# EAGLE board ESP_CAM_VVN_v2 (EAGLE 9.6.2)
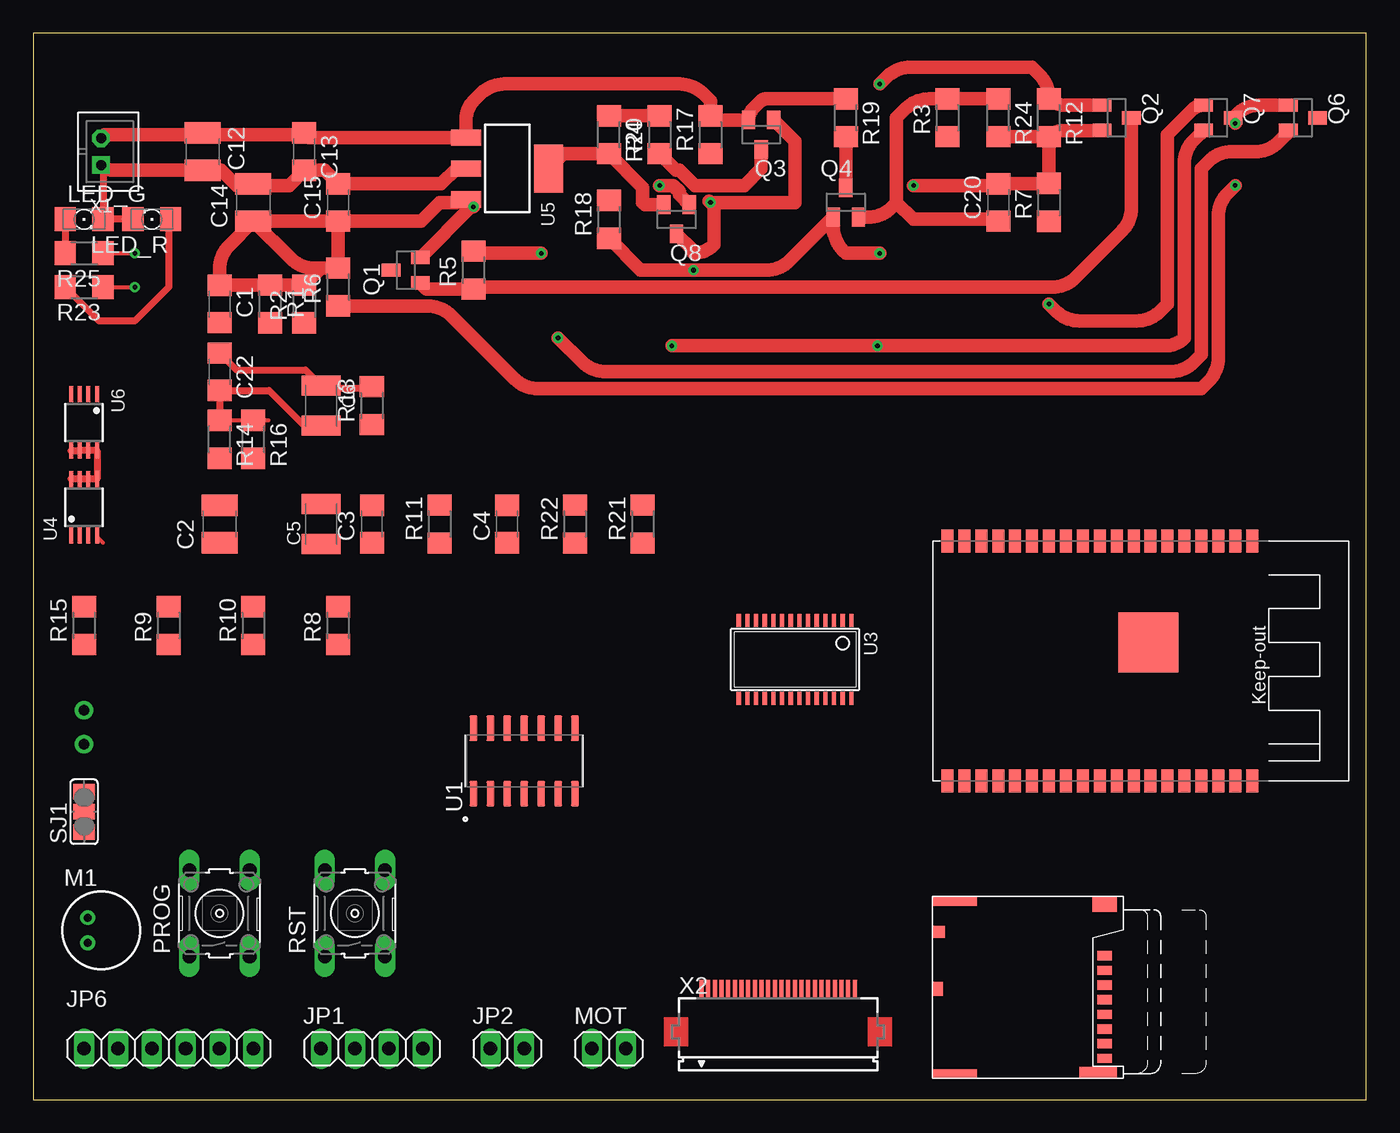
[diagram p0: board, top side]
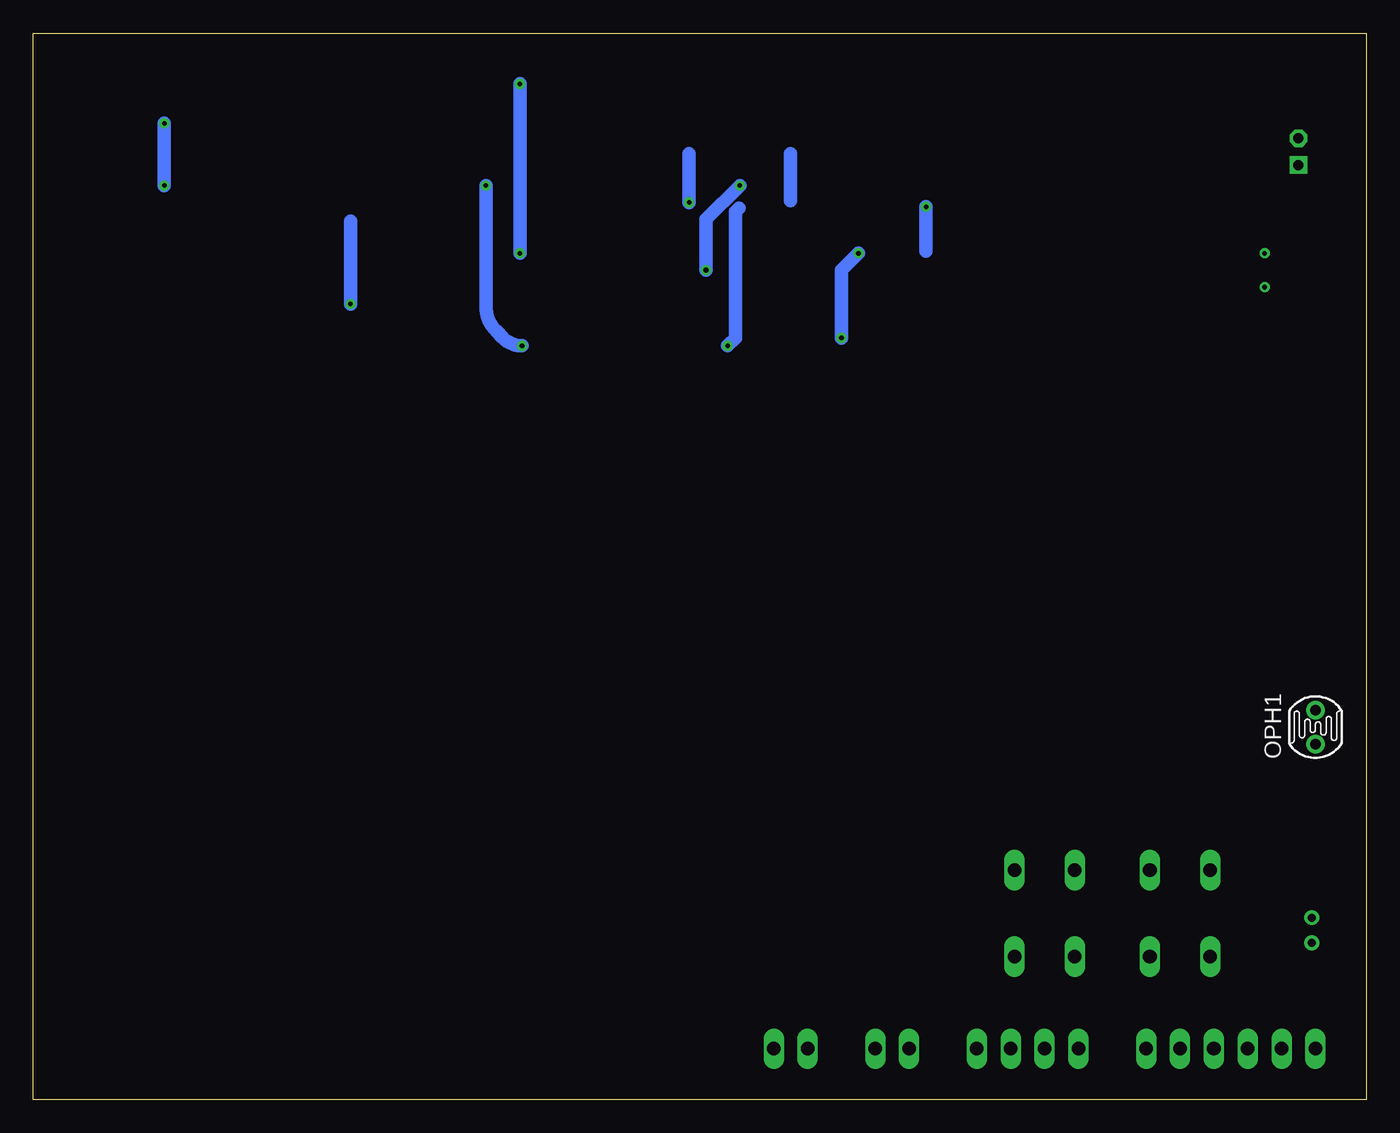
[diagram p1: board, bottom side, seen from below]

Size 100 x 80 mm. Coordinates in mm from the lower left corner, seen from the top.
Outline: 0,0 100,0 100,80 0,80 0,0
Copper layers (1*16): Top 0.035mm / dielectric 1.5mm / Bottom 0.035mm
Design rules "default": minimum track width 6mil, minimum drill 0.35mm, track to track 6mil, track to pad 6mil, pad to pad 6mil, via to via 6mil, smd to smd 6mil, copper to edge 40mil, drill to drill 6mil, minimum pad ring 10mil, minimum via ring 8mil, stop-mask expansion 4mil, vias tented up to drill 0mil, thermal gap 10mil

## Footprints (pad centres in the part's own frame; a part is rotated, then mirrored left to right if it is on the bottom)
C1206 = smd 1.6 x 1.8: 1 -1.4,0; 2 1.4,0
C1210 = smd 1.6 x 2.7: 1 -1.4,0; 2 1.4,0
C1210K = smd 1.5 x 2.9: 1 -1.5,0; 2 1.5,0
1X04 = drill 1.016 long: 1 -3.81,0; 2 -1.27,0; 3 1.27,0; 4 3.81,0
1X02 = drill 1.016 long: 1 -1.27,0; 2 1.27,0
1X06 = drill 1.016 long: 1 -6.35,0; 2 -3.81,0; 3 -1.27,0; 4 1.27,0; 5 3.81,0; 6 6.35,0
1206 = smd 1.6 x 1.803: A -1.422,0; C 1.422,0
WM-62PC/62PK = drill 0.6 pad 1: 1 -1,0.95; 2 -1,-0.95
VT900 = drill 0.8 pad 1.4: 1 -1.27,0; 2 1.27,0
B3F-10XX = drill 1.016 long: 1 -3.251,2.261; 2 3.251,2.261; 3 -3.251,-2.261; 4 3.251,-2.261
SOT23 = smd 1 x 1.4: 1 -0.95,-1.1; 2 0.95,-1.1; 3 0,1.1
R1206 = smd 1.6 x 1.803: 1 -1.422,0; 2 1.422,0
MICROSDMOLEX = smd 0.7 x 1.1: P$1 12.15,-0.9; P$2 11.05,-0.9; P$3 9.95,-0.9; P$4 8.85,-0.9; P$5 7.75,-0.9; P$6 6.65,-0.9; P$7 5.55,-0.9; P$8 4.45,-0.9 | smd 1.14 x 1.83: P$9 0.57,-0.915 | smd 0.7 x 3.33: P$10 0.35,-12.165; P$11 13.31,-12.165 | smd 0.86 x 2.8: P$12 13.23,-1.4 | smd 0.9 x 0.93: P$13 2.66,-13.365 | smd 1.05 x 0.78: P$14 6.925,-13.44
SJ_2 = smd 1.168 x 1.6: 1 -1.524,0; 2 0,0; 3 1.524,0
SOIC127P600X175-14N = smd 1.9 x 0.6: 1 -2.455,3.81; 2 -2.455,2.54; 3 -2.455,1.27; 4 -2.455,0; 5 -2.455,-1.27; 6 -2.455,-2.54; 7 -2.455,-3.81; 8 2.455,-3.81; 9 2.455,-2.54; 10 2.455,-1.27; 11 2.455,0; 12 2.455,1.27; 13 2.455,2.54; 14 2.455,3.81
ESP32-WROVER = smd 1.7 x 0.9: CLK 18,1.27; CMD 0,1.27; EN 0,21.59; GND 0,24.13; GND1 0,6.35; GND3 18,24.13; IO0 18,7.62; IO2 18,6.35; IO4 18,8.89; IO5 18,12.7; IO12 0,7.62; IO13 0,5.08; IO14 0,8.89; IO15 18,5.08; IO18 18,13.97; IO19 18,15.24; IO21 18,17.78; IO22 18,21.59; IO23 18,22.86; IO25 0,12.7; IO26 0,11.43; IO27 0,10.16; IO32 0,15.24; IO33 0,13.97; IO34 0,17.78; IO35 0,16.51; NC0 18,16.51; NC1 18,10.16; NC2 18,11.43; RXD0 18,19.05; SD0 18,2.54; SD1 18,3.81; SD2 0,3.81; SD3 0,2.54; SENSOR_VN 0,19.05; SENSOR_VP 0,20.32; TXD0 18,20.32; VDD33 0,22.86 | smd 4.5 x 4.5: GND2 7.62,16.34
TSSOP28 = smd 0.305 x 0.991: 1 -4.225,-2.918; 2 -3.575,-2.918; 3 -2.925,-2.918; 4 -2.275,-2.918; 5 -1.625,-2.918; 6 -0.975,-2.918; 7 -0.325,-2.918; 8 0.325,-2.918; 9 0.975,-2.918; 10 1.625,-2.918; 11 2.275,-2.918; 12 2.925,-2.918; 13 3.575,-2.918; 14 4.225,-2.918; 15 4.225,2.918; 16 3.575,2.918; 17 2.925,2.918; 18 2.275,2.918; 19 1.625,2.918; 20 0.975,2.918; 21 0.325,2.918; 22 -0.325,2.918; 23 -0.975,2.918; 24 -1.625,2.918; 25 -2.275,2.918; 26 -2.925,2.918; 27 -3.575,2.918; 28 -4.225,2.918
MSOP08 = smd 0.3 x 1.2: 1 -0.976,-2.113; 2 -0.326,-2.113; 3 0.324,-2.113; 4 0.974,-2.113; 5 0.974,2.112; 6 0.324,2.112; 7 -0.326,2.112; 8 -0.976,2.112
SOT223 = smd 1.219 x 2.235: 1 -2.311,-3.099; 2 0,-3.099; 3 2.311,-3.099 | smd 3.6 x 2.2: 4 0,3.099
B2B-PH-K-S = drill 0.75 pad 1.3 square: 1 1,0 | drill 0.75 pad 1.3 octagon: 2 -1,0
FH12-24S-0.5SH = smd 0.3 x 1.3: 1 -5.75,3.25; 2 -5.25,3.25; 3 -4.75,3.25; 4 -4.25,3.25; 5 -3.75,3.25; 6 -3.25,3.25; 7 -2.75,3.25; 8 -2.25,3.25; 9 -1.75,3.25; 10 -1.25,3.25; 11 -0.75,3.25; 12 -0.25,3.25; 13 0.25,3.25; 14 0.75,3.25; 15 1.25,3.25; 16 1.75,3.25; 17 2.25,3.25; 18 2.75,3.25; 19 3.25,3.25; 20 3.75,3.25; 21 4.25,3.25; 22 4.75,3.25; 23 5.25,3.25; 24 5.75,3.25

## Placement (x,y rotation side)
C1  100n  [C1206]  13.97,59.69 270 top
C2  10u  [C1210]  13.97,43.18 90 top
C3  100n  [C1206]  25.4,43.18 90 top
C4  15p  [C1206]  35.56,43.18 90 top
C5  1u  [C1210K]  21.59,43.18 90 top
C6  1u  [C1210K]  21.59,52.07 270 top
C12  10u  [C1210]  12.7,71.12 270 top
C13  100n  [C1206]  20.32,71.12 270 top
C14  10u  [C1210]  16.51,67.31 90 top
C15  100n  [C1206]  22.86,67.31 90 top
C20  100n  [C1206]  72.39,67.31 90 top
C22  100n  [C1206]  13.97,54.61 270 top
JP1  [1X04]  25.4,3.81 0 top
JP2  [1X02]  35.56,3.81 0 top
JP6  [1X06]  10.16,3.81 0 top
LED_G  [1206]  3.81,66.04 0 top
LED_R  [1206]  8.89,66.04 180 top
M1  ELECTRET_MICROPHON-WM-62PC/62PK  [WM-62PC/62PK]  5.08,12.7 0 top
MOT  [1X02]  43.18,3.81 0 top
OPH1  VT93N2  [VT900]  3.81,27.94 270 bottom
PROG  [B3F-10XX]  13.97,13.97 90 top
Q1  SI2305CDS  [SOT23]  27.94,62.23 90 top
Q2  BSS131  [SOT23]  81.28,73.66 270 top
Q3  SI2305CDS  [SOT23]  54.61,72.39 180 top
Q4  BSS138  [SOT23]  60.96,67.31 0 top
Q6  SI2305CDS  [SOT23]  95.25,73.66 270 top
Q7  BSS131  [SOT23]  88.9,73.66 270 top
Q8  BSS131  [SOT23]  48.26,66.04 180 top
R1  100k  [R1206]  17.78,59.69 270 top
R2  10k  [R1206]  20.32,59.69 90 top
R3  0  [R1206]  68.58,73.66 90 top
R4  33k  [R1206]  46.99,72.39 90 top
R5  33k  [R1206]  33.02,62.23 90 top
R6  33k  [R1206]  22.86,60.96 90 top
R7  33k  [R1206]  76.2,67.31 90 top
R8  0  [R1206]  22.86,35.56 90 top
R9  4.7K  [R1206]  10.16,35.56 90 top
R10  4.7K  [R1206]  16.51,35.56 90 top
R11  10k  [R1206]  30.48,43.18 90 top
R12  33k  [R1206]  76.2,73.66 270 top
R13  100k  [R1206]  25.4,52.07 90 top
R14  220k  [R1206]  13.97,49.53 270 top
R15  12k  [R1206]  3.81,35.56 90 top
R16  10k  [R1206]  16.51,49.53 270 top
R17  33k  [R1206]  50.8,72.39 90 top
R18  33k  [R1206]  43.18,66.04 90 top
R19  150k  [R1206]  60.96,73.66 270 top
R20  33k  [R1206]  43.18,72.39 270 top
R21  10k  [R1206]  45.72,43.18 90 top
R22  10k  [R1206]  40.64,43.18 90 top
R23  150  [R1206]  3.81,60.96 180 top
R24  10k  [R1206]  72.39,73.66 270 top
R25  100  [R1206]  3.81,63.5 180 top
RST  [B3F-10XX]  24.13,13.97 90 top
SD1  MICRO-SD-8  [MICROSDMOLEX]  81.28,15.24 270 top
SJ1  [SJ_2]  3.81,21.59 90 top
U1  MCP3428-E/SL  [SOIC127P600X175-14N]  36.83,25.4 90 top
U2  ESP32-WROVER-E  [ESP32-WROVER]  67.31,41.91 270 top
U3  PCA9685PW  [TSSOP28]  57.15,33.02 180 top
U4  MIC5239-ADJMM  [MSOP08]  3.81,44.45 0 top
U5  MIC5239S  [SOT223]  35.56,69.85 270 top
U6  MIC5239-ADJMM  [MSOP08]  3.81,50.8 180 top
X1  B2B-PH-K-S  [B2B-PH-K-S]  5.08,71.12 270 top
X2  FH12-24S-0.5SH  [FH12-24S-0.5SH]  55.88,5.08 0 top

## Library data of the parts
C1-C4 C12-C15 C20 C22 = eagle-ltspice; SPICEMODEL: NONE; SPICEPREFIX: C
C5 C6 = rcl; SPICEPREFIX: C
JP1 JP2 JP6 MOT = pinhead
LED_G LED_R = led
M1 = microphon
OPH1 = photo-elements
PROG RST = switch-omron; MPN: B3F-1000; OC_FARNELL: 176432; OC_NEWARK: 36M3542
Q1-Q3 Q6-Q8 = transistor-small-signal-perso
Q4 = detect
R1-R12 R17-R25 = eagle-ltspice; SPICEMODEL: NONE; SPICEPREFIX: R
R13-R16 = rcl; SPICEPREFIX: R
SD1 = micro-sd_cp
SJ1 = jumper
U1 = MCP3428-E_SL; AVAILABILITY: In Stock; DESCRIPTION: 16 Bit Analog to Digital Converter 4 Input 1 Sigma-Delta 14-SOIC; MF: Microchip; MP: MCP3428-E/SL; PACKAGE: SOIC-14 Microchip; PRICE: None; PURCHASE-URL: https://pricing.snapeda.com/search/part/MCP3428-E/SL/?ref=eda
U2 = 32teeth - ESP32-WROVER
U3 = i2c-led-controller
U4-U6 = micrel
X1 = con-JST PH
X2 = con-hirose; MPN: FH12-24S-0.5SH(55); OC_FARNELL: 1324552; OC_NEWARK: 34M6170

## Nets
5V_MES: R4.2 R20.1 U1.11
+5V: C12.1 C13.1 Q3.2 R17.2 R19.1 U5.1 X1.2
+5V/1: Q3.3 R4.1 SJ1.1
CA_D0_SD_D1: SD1.P$8 U2.IO4 X2.19
CA_D1: U2.IO5 X2.21
CA_D2: U2.IO18 X2.22
CA_D3: U2.IO19 X2.20
CA_D4: U2.SENSOR_VP X2.18
CA_D5: U2.SENSOR_VN X2.16
CA_D6: U2.IO34 X2.14
CA_D7: U2.IO35 X2.12
CA_HREF: U2.IO23 X2.9
CA_PCLK: C4.2 U2.IO22 X2.17
CA_PWDN: R11.2 X2.8
CA_RST_SD_CMD: SD1.P$3 U2.IO15 X2.6
CA_SIO_C: R10.2 U2.IO27 X2.5
CA_SIO_D: R9.2 U2.IO26 X2.3
CA_VSYNC: U2.IO25 X2.7
CA_XCLK_SD_DET: SD1.P$14 U2.IO21 X2.13
GND: C1.2 C2.2 C3.2 C4.1 C5.2 C6.2 C12.2 C13.2 C14.2 C15.2 C20.2 C22.2 JP1.4 JP6.1 LED_G.C LED_R.C M1.1 OPH1.1 PROG.3 PROG.4 Q2.2 Q7.2 Q8.2 R7.2 R11.1 R12.2 R14.1 R16.1 R18.2 R20.2 R24.2 RST.3 RST.4 SD1.P$6 SD1.P$9 SD1.P$10 SD1.P$11 SD1.P$12 SD1.P$13 U1.2 U1.4 U1.12 U2.GND U2.GND1 U2.GND2 U2.GND3 U3.14 U4.5 U4.6 U4.7 U4.8 U5.2 U5.4 U6.5 U6.6 U6.7 U6.8 X1.1 X2.2 X2.15
IO0: JP6.6 PROG.1 PROG.2 R1.2
LDR: OPH1.2 R22.2 U1.3
LED_G: R25.1 U3.22
LED_R: R23.1 U3.21
N$1: Q1.1 Q2.3 R5.1
N$2: Q4.3 R19.2
N$3: C20.1 Q4.2 R3.2 R24.1
N$4: SJ1.2 U3.28
N$5: JP2.2 U1.13
N$6: Q6.1 Q7.3 R6.1
N$7: LED_R.A R23.2
N$8: LED_G.A R25.2
N$9: Q3.1 Q8.3 R17.1
N$10: R8.2 X2.11
N$11: M1.2 R21.1 U1.1
N$12: JP2.1 U1.14
N$13: MOT.1 U3.6
N$14: MOT.2 U3.7
N$91: R13.1 R14.2 U6.2
N$92: R15.1 R16.2 U4.2
POWER: Q2.1 Q4.1 Q8.1 R12.1 R18.1 U3.8
POWER_SD: Q7.1 R7.1 U3.9
RST: C3.1 JP6.2 R2.1 RST.1 RST.2 U2.EN
RX: JP6.5 U2.RXD0
SCL: JP1.2 U1.8 U2.IO32 U3.26
SD_CLK: SD1.P$5 U2.IO14
SD_D0: SD1.P$7 U2.IO2
SD_D2: SD1.P$1 U2.IO12
SD_D3: SD1.P$2 U2.IO13
SDA: JP1.3 U1.7 U2.IO33 U3.27
TX: JP6.4 U2.TXD0
V1_2.5V: X2.4
V1_2.7V: C5.1 R15.2 U4.4
V2_1.8V: C6.1 C22.1 R13.2 U6.4 X2.10
V+: JP1.1 Q1.3 R8.1 R9.1 R10.1 R21.2 R22.1 SJ1.3 U1.6 U4.1 U4.3 U6.1 U6.3
V+_SD: Q6.3 SD1.P$4
VALIM: R3.1
VCC: C1.1 C2.1 C14.1 C15.1 JP6.3 Q1.2 Q6.2 R1.1 R2.2 R5.2 R6.2 U2.VDD33 U5.3
VSS: U1.5

## Tracks (layer width: path | path; a pad name or v marks a point on that pad's centre or on a via)
5V_MES
  Top 1.016: R4.2 R20.1 43.03,73.66
+5V
  Top 1.016: X1.2 5.35,72.39 20.19,72.39 C13.1 20.68,72.16 U5.1 32.46,73.58 arc-45 33.02,74.93 33.55,75.46 arc-45 35.34,76.2 48.48,76.2 arc-45 50.27,75.46 50.8,74.93 R17.2 51.12,73.49 Q3.2 arc-45 54.01,74.33 54.61,74.93 arc-45 54.98,75.08 R19.1
+5V/1
  Top 1.016: Q3.3 54.61,69.85 53.34,68.58 49.66,68.58 48.49,69.75 48.21,69.75 R4.1
GND  (via drill 0.35)
  Top 0.305: R14.1 R16.1 17.63,50.95
  Top 0.508: X1.1 arc-45 5.23,69.75 LED_G.C LED_R.C | U6.5 U6.6 U6.7 U6.8 U4.5 U4.6 U4.7 U4.8 | R14.1 C22.2 17.68,53.21 20.22,50.67 21.49,50.67 C6.2
  Top 1.016: 31.75,69.85 30.61,68.71 C15.2 21.85,69.72 C13.2 19.18,68.58 15.24,68.58 14.1,69.72 C12.2 6.05,69.72 arc-45 X1.1 | U5.4 39.78,70.97 R20.2 45.72,68.43 45.72,67.31 45.89,67.14 Q8.2 | R24.2 R12.2 | R12.2 arc-45 77.34,72.71 Q2.2 | R12.2 R7.2 arc-45 76.15,68.71 C20.2 arc-45 72.08,68.58 v66.04,68.58 | v47.91,56.55 v63.33,56.55 84.92,56.55 arc45 86.36,57.15 86.36,70.22 arc-45 87.1,72.01 Q7.2
  Bottom 1.016: R20.2 R18.2 | v47.91,56.55 47.31,57.15 47.31,66.61 47.04,66.87 | v63.33,56.55 arc45 64.77,57.15 65.3,57.68 arc45 66.04,59.47 v66.04,68.58
IO0
  Top 0.508: 11.43,17.5 PROG.2
LED_G  (via drill 0.35)
  Top 0.305: R25.1 v7.62,63.5
LED_R  (via drill 0.35)
  Top 0.305: R23.1 v7.62,60.96
N$1
  Top 1.016: Q1.1 29.51,60.81 R5.1 arc-45 33.39,60.96 76.42,60.96 arc45 78.21,61.7 81.64,65.13 arc45 82.38,66.92 Q2.3
N$2
  Top 1.016: R19.2 Q4.3
N$3
  Top 1.016: R24.1 R3.2 67.24,75.08 arc45 65.45,74.34 64.77,73.66 64.77,67.31 | Q4.2 62.62,66.21 arc45 64.41,66.95 64.77,67.31 | C20.1 arc45 72.08,66.04 66.04,66.04 64.77,67.31
N$6  (via drill 0.35)
  Top 1.016: Q6.1 92,74.61 arc45 90.21,73.87 Q7.3 arc-45 v90.17,73.25 | R6.1 29.58,59.54 arc-45 31.38,58.79 36.09,54.08 arc45 37.88,53.34 87.63,53.34 88.16,53.87 arc45 88.9,55.66 88.9,66.26 arc-45 89.64,68.05 v90.17,68.58
  Bottom 1.016: v90.17,68.58 v90.17,73.25
N$7
  Top 0.508: LED_R.A arc45 10.16,65.67 10.16,60.96 7.62,58.42 4.93,58.42 R23.2
N$8
  Top 0.508: LED_G.A R25.2
N$9  (via drill 0.35)
  Top 1.016: Q3.1 57.15,71.9 57.15,67.31 v50.8,67.31 | 50.7,67.41 v50.8,67.31 | Q8.3 49.41,63.79 arc-45 49.53,63.5 arc45 51.06,64.14 51.06,67.05 arc45 v50.8,67.31
  Bottom 1.016: R17.1 v50.8,67.31
POWER  (via drill 0.35)
  Top 1.016: R18.1 45.57,62.23 v49.53,62.23 54.98,62.23 arc45 56.77,62.97 Q4.1 60.01,65.5 arc45 60.75,63.71 60.96,63.5 v63.5,63.5 | v63.5,76.2 64.03,76.73 arc-45 65.82,77.47 74.93,77.47 75.46,76.94 arc-45 76.2,75.15 R12.1 arc45 77.34,74.61 Q2.1 | Q8.1 48.47,67.88 48.47,68.11 48,68.58 v46.99,68.58
  Bottom 1.016: v63.5,63.5 v63.5,76.2 | v46.99,68.58 49.53,66.04 v49.53,62.23
POWER_SD  (via drill 0.35)
  Top 1.016: v76.2,59.69 76.73,59.16 arc45 78.52,58.42 82.77,58.42 arc45 84.56,59.16 85.09,59.69 85.09,72.39 86.96,74.26 arc-45 Q7.1
  Bottom 1.016: R7.1 v76.2,59.69
V1_2.7V
  Top 0.305: U4.4 4.78,42.21 5.23,41.76
V2_1.8V
  Top 0.508: 13.9,55.95 C22.1 15.24,54.74 20.42,54.74 C6.1 21.82,53.34 25.25,53.34 R13.2 | 13.9,55.95 13.41,55.45 | 13.75,55.88 arc45 13.9,55.95
VCC  (via drill 0.35)
  Top 1.016: C14.1 C15.1 | C15.1 29.08,65.91 30.48,67.31 31.75,67.31 | U5.3 v33.02,66.98 32.84,66.98 Q1.2 | C15.1 R6.2 21.59,62.38 | R5.2 arc45 33.39,63.5 v38.1,63.5 | v39.37,57.15 41.17,55.35 arc45 42.96,54.61 85.31,54.61 arc45 87.1,55.35 87.63,55.88 87.63,69.85 88.16,70.38 arc-45 89.95,71.12 91.66,71.12 arc45 93.45,71.86 94.04,72.45 arc45 Q6.2 | C14.1 19.29,63.13 arc45 21.09,62.38 21.59,62.38 | 21.59,62.38 21.06,61.86 arc-45 19.27,61.11 R1.1 arc-45 17.73,61.09 C1.1 13.97,62.32 arc-45 14.71,64.11 C14.1
  Bottom 1.016: v33.02,66.98 R5.2 | v38.1,63.5 39.37,62.23 v39.37,57.15